# Altium PCB lession3_Kit.PcbDoc
Units mil, origin at the board's own origin, x right, y up, seen from the top; angles counter-clockwise.
Board outline 6000 x 4000 mil, 2 copper layers (Top Layer, Bottom Layer); 28 components, 41 nets, 147 pads, 2 vias.
Unrouted connection lines stored in the file: 92.
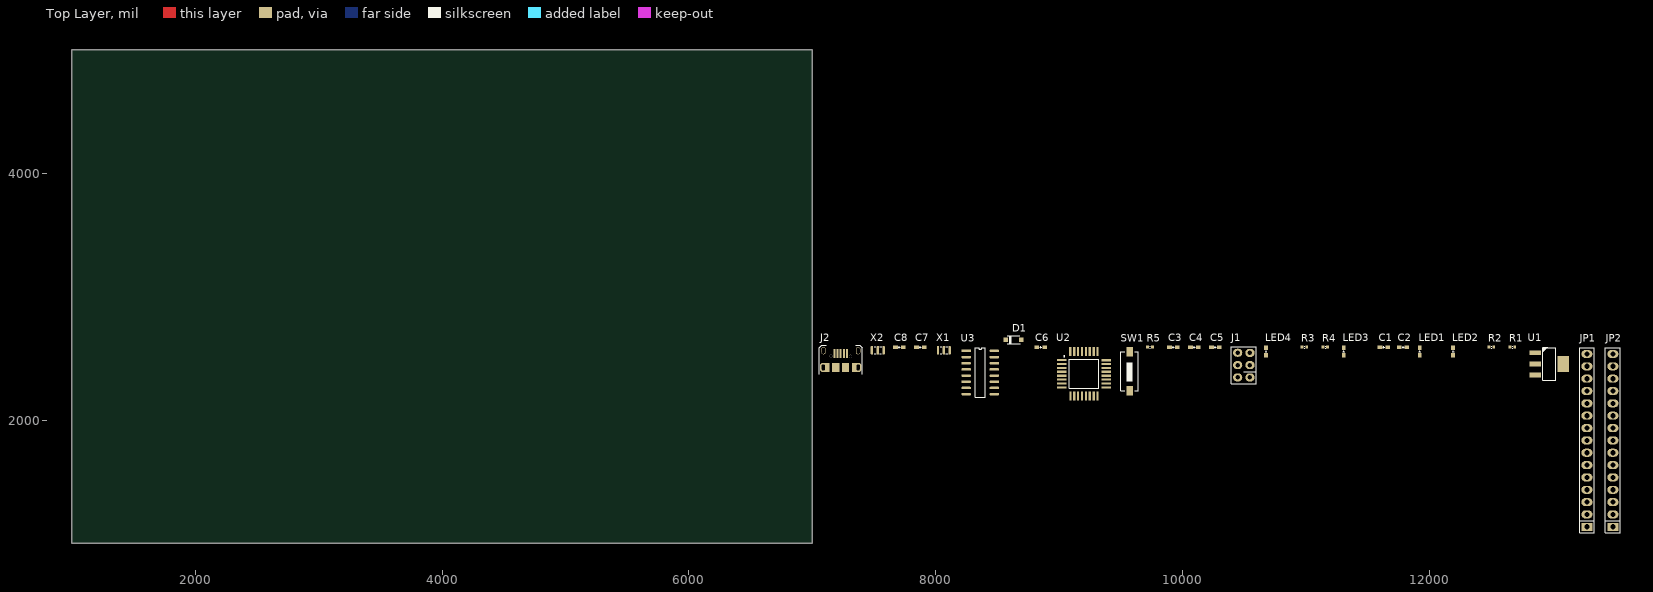
[diagram p0: Top Layer view]
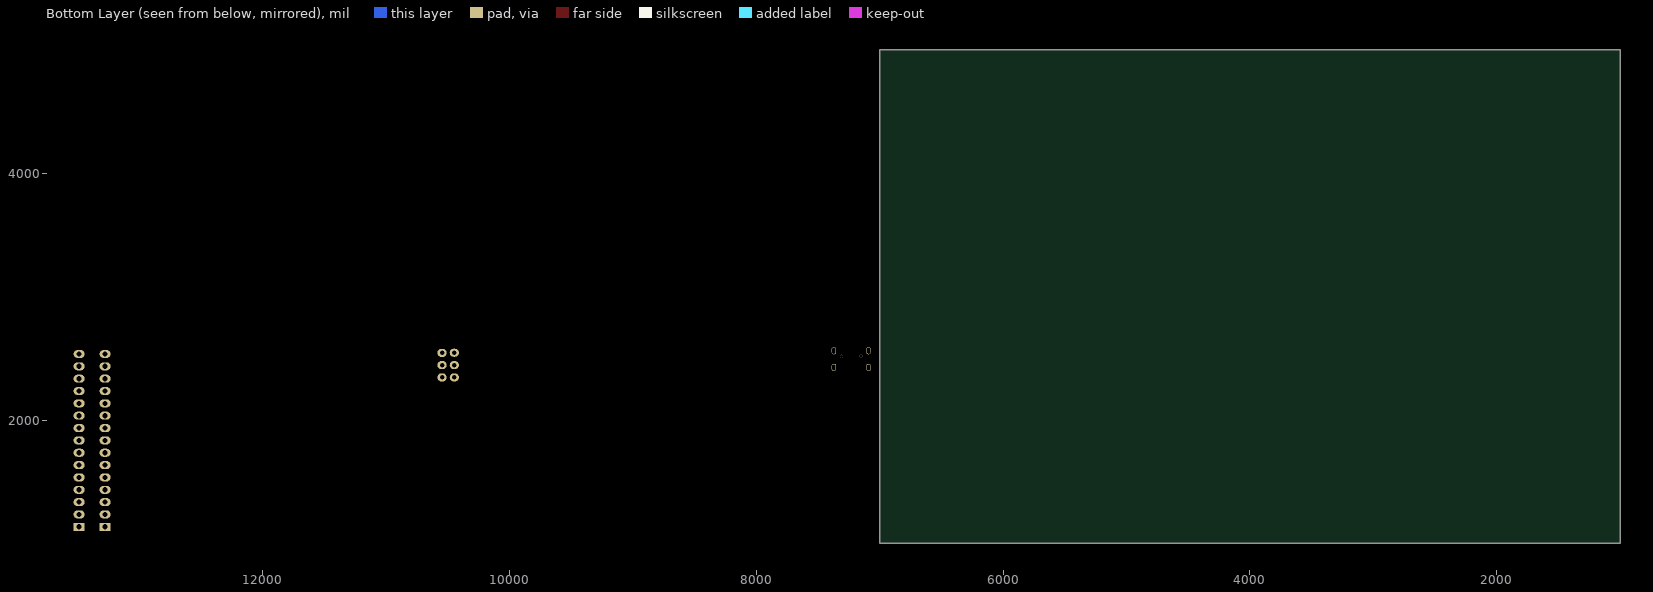
[diagram p1: Bottom Layer view, seen from below]

## Layer stack, top to bottom
Top Solder: solder mask 0.4, Solder Resist, Dk 3.5
Top Layer: signal copper 1.4
Dielectric 1: dielectric 12.6, FR-4, Dk 4.8
Bottom Layer: signal copper 1.4
Bottom Solder: solder mask 0.4, Solder Resist, Dk 3.5

## Board outline
1000,1000 7000,1000 7000,5000 1000,5000

## Design rules (kind name [scope] priority, off if disabled: settings)
Clearance [All] p1: gap=10 ignorepadtopadclearanceinfootprint=FALSE except(0: Arc-Hole Track-Hole SMDPad-Hole THPad-Hole Via-Hole Fill-Hole Poly-Hole Region-Hole Text-Hole)
PolygonConnect [All] p1: connectstyle=Relief reliefconductorwidth=10 reliefentries=4 polygonreliefangle="90 Angle" airgapwidth=10
RoutingVias [All] p1: holewidth=28 width=50 viastyle="Through Hole" minholewidth=28 minwidth=50 maxholewidth=28 maxwidth=50
SolderMaskExpansion [All] p1: expansion=4
Width [All] p1: maxlimit=10 minlimit=10 preferedwidth=10
30 further rules are at their usual default settings.

## Components (designator, comment, footprint, x,y, rotation, side; value= is the part's Value field where it differs from the comment)
C1 "10uF" 0603_cap 11630,2590 r0 top value=103
C2 "10uF" 0603_cap 11785,2590 r0 top value=103
C3 "100nF" 0603_cap 9925,2590 r0 top value=103
C4 "100nF" 0603_cap 10095,2590 r0 top value=103
C5 "100nF" 0603_cap 10265,2590 r0 top value=103
C6 "100nF" 0603_cap 8850,2590 r0 top value=103
C7 "100nF" 0603_cap 7875,2590 r0 top value=103
C8 "100nF" 0603_cap 7705,2590 r0 top value=103
D1 "Schottky" SOD-123 8630,2650 r0 top
J1 "Connector 3x2" JP3x2 10495,2445 r90 top
J2 "USB type B" "MICROUSB - v2" 7230,2470 r0 top
JP1 "JP15" JP15 13275,1835 r90 top value=JP11
JP2 "JP15" JP15 13485,1835 r90 top value=JP11
LED1 "LED SMD" 0603_LED 11920,2555 r90 top
LED2 "LED SMD" 0603_LED 12190,2555 r90 top
LED3 "LED SMD" 0603_LED 11305,2555 r90 top
LED4 "LED SMD" 0603_LED 10675,2555 r90 top
R1 "1k" 0402_res 12670,2590 r0 top value="R1/4W - 1K"
R2 "1k" 0402_res 12500,2590 r0 top value="R1/4W - 1K"
R3 "1k" 0402_res 10985,2590 r0 top value="R1/4W - 1K"
R4 "1k" 0402_res 11155,2590 r0 top value="R1/4W - 1K"
R5 "10k" 0402_res 9735,2590 r0 top value="R1/4W - 1K"
SW1 "SW" "Tact Switch TS6X3.6" 9570,2395 r90 top value="SW chip 2 pin"
U1 "AMS1117" SOT223_N 12970,2455 r0 top
U2 "ATMEGA328P-AU" QFP7X7-G32/X.45N 9200,2375 r0 top
U3 "CH340G" SOP16 8360,2385 r0 top
X1 "16Mhz" XT3_3213 8065,2565 r0 top value=4Mhz
X2 "12Mhz" XT3_3213 7530,2565 r0 top value=4Mhz

## Footprints (in the part's own frame and the unit in brackets; to place one, negate y for a bottom-side part, rotate by r counter-clockwise, add the part's x,y. Pads: shape width x height; smd on the part's side, far side on the other; paste and mask are expansions set on the pad)
0402_res [mm]
  rect 0.6x0.6 smd mask+0: 1(-0.5,0) 2(0.5,0)
  silkscreen extent -0.05,-0.2 0.05,0.2, body extent -0.52,-0.3 0.52,0.3, height 0.34
0603_cap [mm]
  rect 0.95x0.8 smd mask+0: 1(-0.8,0) 2(0.8,0)
  silkscreen extent -0.2,-0.2 0.2,0.2, body extent -0.8,-0.4 0.8,0.4, height 0.3
0603_LED [mm]
  rect 0.95x0.8 smd mask+0: 1(-0.8,0) 2(0.8,0)
  silkscreen extent -0.2,-0.2 0.2,0.2, body extent -0.8,-0.4 0.8,0.4, height 0.38
JP3x2 [mil] "Connector 3x2"
  oval 65x75 hole 36: 1(-100,-50) 2(0,-50) 3(99,-50) 4(-100,50) 5(0,50) 6(100,50)
  silkscreen extent -150,-100 150,100, body extent -150,-100 150,100, height 335
JP15 [mil]
  rect 65x90 hole 42: 1(-700,0)
  oval 65x90 hole 42: 2(-600,0) 3(-500,0) 4(-400,0) 5(-300,0) 6(-200,0) 7(-100,0) 8(0,0) 9(100,0) 10(200,0) 11(300,0) 12(400,0) 13(500,0) 14(600,0) 15(700,0)
  silkscreen extent -750,-60 750,60, body extent -750,-50 750,50, height 366
"MICROUSB - v2" [mm]
  rect 0.4x1.85 smd: 1(-1.312,1.8) 2(-0.663,1.8) 3(-0.012,1.8) 4(0.637,1.8) 5(1.288,1.8)
  oval 0.9x1.5 hole 0.65 slot 1.2 at 90 deg: 6(3.575,2.338) 7(-3.575,2.338) 8(3.575,-1.112) 9(-3.575,-1.112)
  rect 1.5x1.9 smd: 8(0.988,-1.112) 9(-1.012,-1.112)
  rect 1x1.9 smd: 8(2.812,-1.112) 9(-2.812,-1.112)
  rrect80% 1.5x1.9 smd: 8(3.525,-1.112) 9(-3.525,-1.112)
  silkscreen extent -4.4,-2.5 4.4,3.41, body extent -4.1,-3.7 4.1,1.73, height 2.71
QFP7X7-G32/X.45N [mm] "QFP; 32 Leads; Body 7 x 7 mm; Pitch 0.8 mm"
  rect 1.905x0.45 smd: 1(-4.583,2.8) 2(-4.583,2) 3(-4.583,1.2) 4(-4.583,0.4) 5(-4.583,-0.4) 6(-4.583,-1.2) 7(-4.583,-2) 8(-4.583,-2.8) 17(4.572,-2.806) 18(4.572,-2.006) 19(4.572,-1.206) 20(4.572,-0.406) 21(4.572,0.394) 22(4.572,1.194) 23(4.572,1.994) 24(4.572,2.794)
  rect 0.45x1.905 smd: 9(-2.794,-4.572) 10(-1.994,-4.572) 11(-1.194,-4.572) 12(-0.394,-4.572) 13(0.406,-4.572) 14(1.206,-4.572) 15(2.006,-4.572) 16(2.806,-4.572) 25(2.8,4.583) 26(2,4.583) 27(1.2,4.583) 28(0.406,4.572) 29(-0.4,4.583) 30(-1.2,4.583) 31(-2,4.583) 32(-2.8,4.583)
  silkscreen extent -4.2,-3 3,3.7, body extent -4.74,-4.86 4.86,4.74, height 1.13
SOD-123 [mm]
  rect 0.9x0.95 smd: 1(1.575,0) 2(-1.575,0)
  silkscreen extent -1.33,-0.8 1.33,0.8, body extent -1.83,-0.8 1.87,0.8, height 1.28
SOP16 [mm]
  rect 2x0.5 smd: 1(-2.9,4.445)
  oval 2x0.5 smd: 2(-2.9,3.175) 3(-2.9,1.905) 4(-2.9,0.635) 5(-2.9,-0.635) 6(-2.9,-1.905) 7(-2.9,-3.175) 8(-2.9,-4.445) 9(2.9,-4.445) 10(2.9,-3.175) 11(2.9,-1.905) 12(2.9,-0.635) 13(2.9,0.635) 14(2.9,1.905) 15(2.9,3.175) 16(2.9,4.445)
  silkscreen extent -1.06,-5.08 1.07,5.08, body extent -3.12,-4.99 3.12,4.99, height 1.59
SOT223_N [mm] "SOT223, 4-Leads, Body 6.5x3.5mm, Pitch 2.3mm, Lead Span 7mm, IPC Medium Density"
  rect 2.4x1 smd: 1(-2.9,2.3) 2(-2.9,0) 3(-2.9,-2.3)
  rect 2.4x3.3 smd: 4(2.9,0)
  silkscreen extent -1.35,-3.35 1.35,3.4, body extent -3.65,-3.35 3.65,3.35, height 1.8
"Tact Switch TS6X3.6" [mm]
  rect 2x1.3 smd: 1(-4,0) 2(4,0)
  silkscreen extent -4.01,-1.8 4.01,1.8, body extent -4,-1.8 4,1.8, height 2.5
XT3_3213 [mm] "Resonator 3213 3 pin"
  rrect50% 0.5x1.7 smd: 1(-1.2,0) 2(0,0) 3(1.2,0)
  silkscreen extent -0.77,-0.76 0.77,0.76, body extent -1.6,-0.66 1.6,0.66, height 0.7

## Part data
C1 C2 C3 C4 C5 C6 C7 C8: library part CM, "Cap SMD"
D1: "MBRS140T3G DIODE SCHOTTKY 40V 1A SMB"
J1: library part JP3x2
J2: Manuf. Part No=10103594-0001LF, Manufacturer=FCI
JP1 JP2: "2.54mm pitch, 15 pin Connect sil female"
LED1 LED2 LED3 LED4: library part LED-SMD-0603
R1 R2 R3 R4 R5: library part R, "Resistor 1/4W"
SW1: library part SW2, "Switch button 2 pin"
U2: "8-bit AVR Microcontrollers"
U3: "USB <-> UART Interface"
X1 X2: library part XT3, "Crystal For all Crystal 2pin."

## Via types
v1: diameter 25.59, hole 25.59, Top Layer to Bottom Layer, tented both sides, 2 vias

## Nets (pads, with @x,y where several pads share a name; then routed paths per layer and width w, separated by ;. In a path a pad name is that pad's centre, name@x,y a point inside that pad or via, vN(x,y) a via of type N, cw(c..) or ccw(c..) an arc to the next point about the centre after c; other vN are vias at no path point)
3V3: C7.2 JP2.14 U3.4
5V: C2.2 C3.2 C4.2 C5.2 J1.4 JP2.4 LED1.1 LED2.1 R1.2 R5.2 U1.2 U2.4 U2.6 U2.18 U3.16
A0: JP2.12 U2.23
A1: JP2.11 U2.24
A2: JP2.10 U2.25
A3: JP2.9 U2.26
A4: JP2.8 U2.27
A5: JP2.7 U2.28
A6: JP2.6 U2.19
A7: JP2.5 U2.22
D2: JP1.5 U2.32
D3: JP1.6 U2.1
D4: JP1.7 U2.2
D5: JP1.8 U2.9
D6: JP1.9 U2.10
D7: JP1.10 U2.11
D8: JP1.11 U2.12
D9: JP1.12 U2.13
D10: JP1.13 U2.14
D11: J1.5 JP1.14 U2.15
D12: J1.1 JP1.15 U2.16
D13: J1.2 JP2.15 R2.1 U2.17
GND: C1.1 C2.1 C3.1 C4.1 C5.1 C6.2 C7.1 J1.6 J2.5 J2.6 J2.7 J2.8 J2.9 JP1.4 JP2.2 LED3.2 LED4.2 SW1.1 U1.1 U2.3 U2.5 U2.21 U3.1 X1.2 X2.2
NetC6_1: C6.1 R5.1 SW1.2 U2.29
NetC8_1: C8.1 U3.13
NetD1_A: J2.1
NetJ2_2: J2.2 U3.6
NetJ2_3: J2.3 U3.5
NetLED1_2: LED1.2 R3.2
NetLED2_2: LED2.2 R4.2
NetLED3_1: LED3.1 R1.1
NetLED4_1: LED4.1 R2.2
NetU2_7: U2.7 X1.3
NetU2_8: U2.8 X1.1
NetU3_7: U3.7 X2.1
NetU3_8: U3.8 X2.3
RST: C8.2 J1.3 JP1.3 JP2.3
RXD: JP1.2 R4.1 U2.30 U3.3
TXD: JP1.1 R3.1 U2.31 U3.2
VIN: C1.2 JP2.1 U1.3
VREF: JP2.13 U2.20
pads on no net: D1.1 D1.2 J2.4 U1.4 U3.9 U3.10 U3.11 U3.12 U3.14 U3.15
copper on no net:
  other v1: 7150.77,2516.77 7308.25,2516.77